# Altium PCB OV2640.PcbDoc
Units mil, origin at the board's own origin, x right, y up, seen from the top; angles counter-clockwise.
Board outline 1130 x 989.35 mil, 2 copper layers (Top Layer, Bottom Layer); 24 components, 26 nets, 116 pads, 39 vias.
Unrouted connection lines stored in the file: 2.
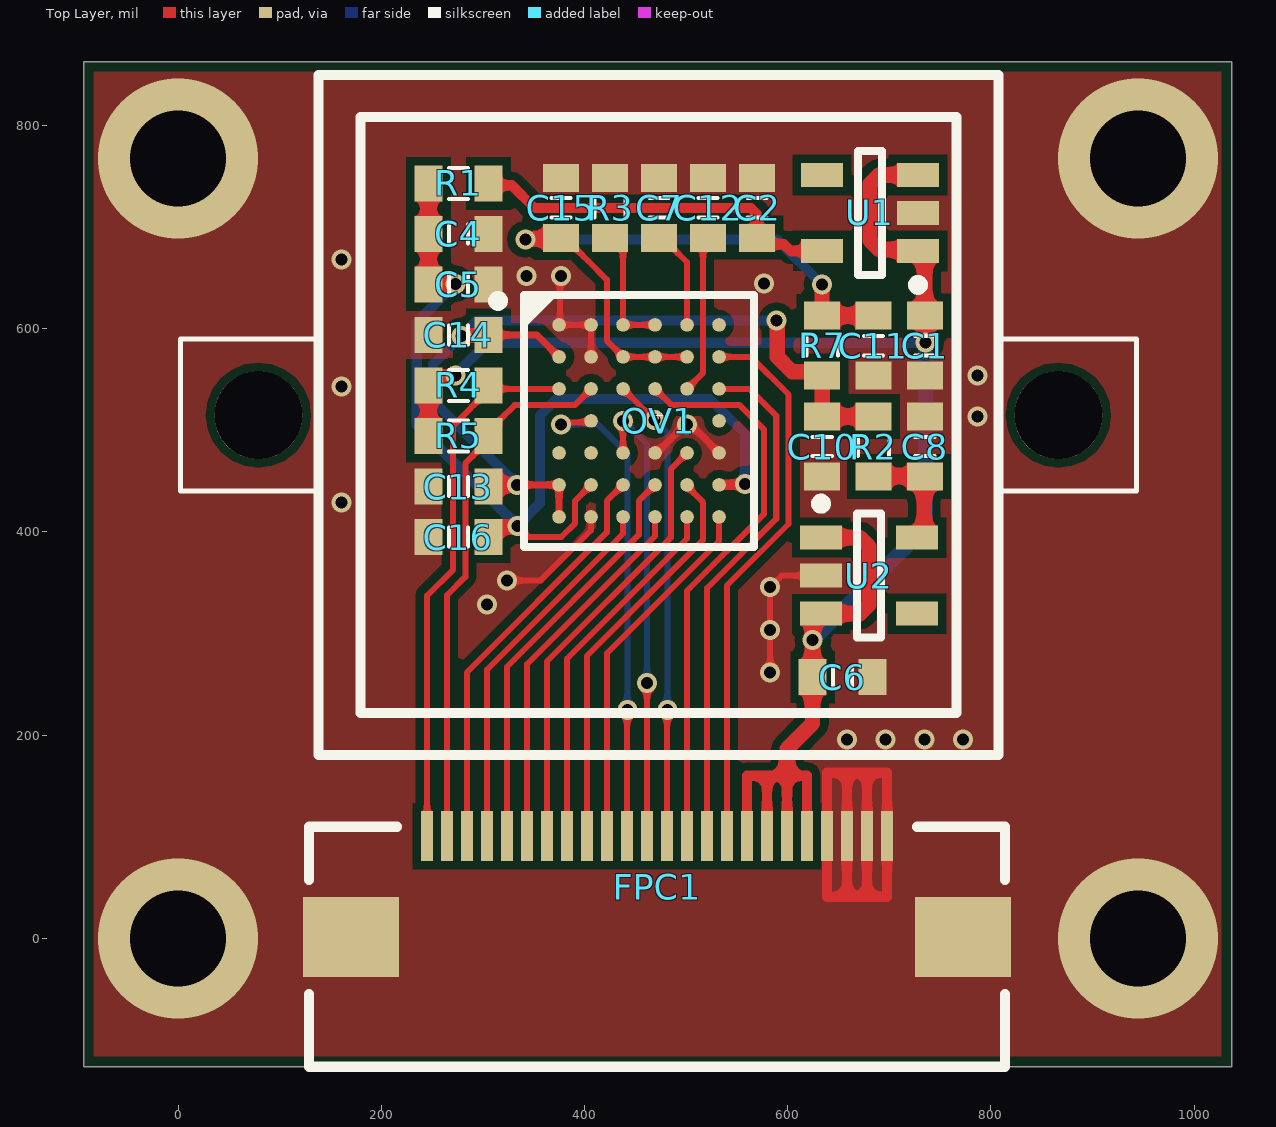
[diagram p0: Top Layer view]
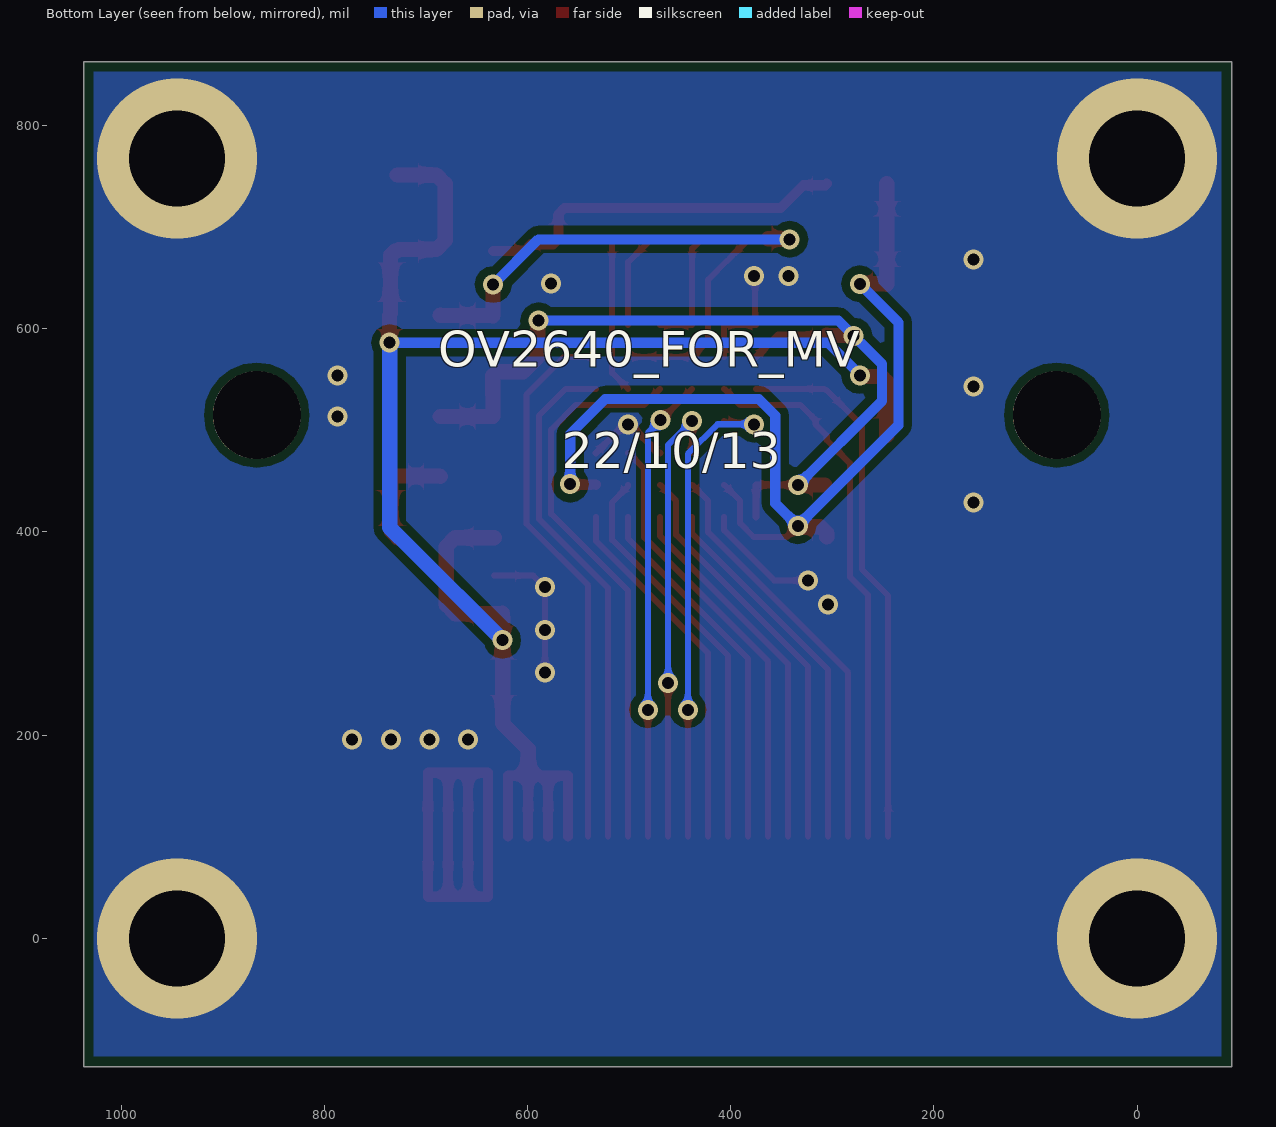
[diagram p1: Bottom Layer view, seen from below]
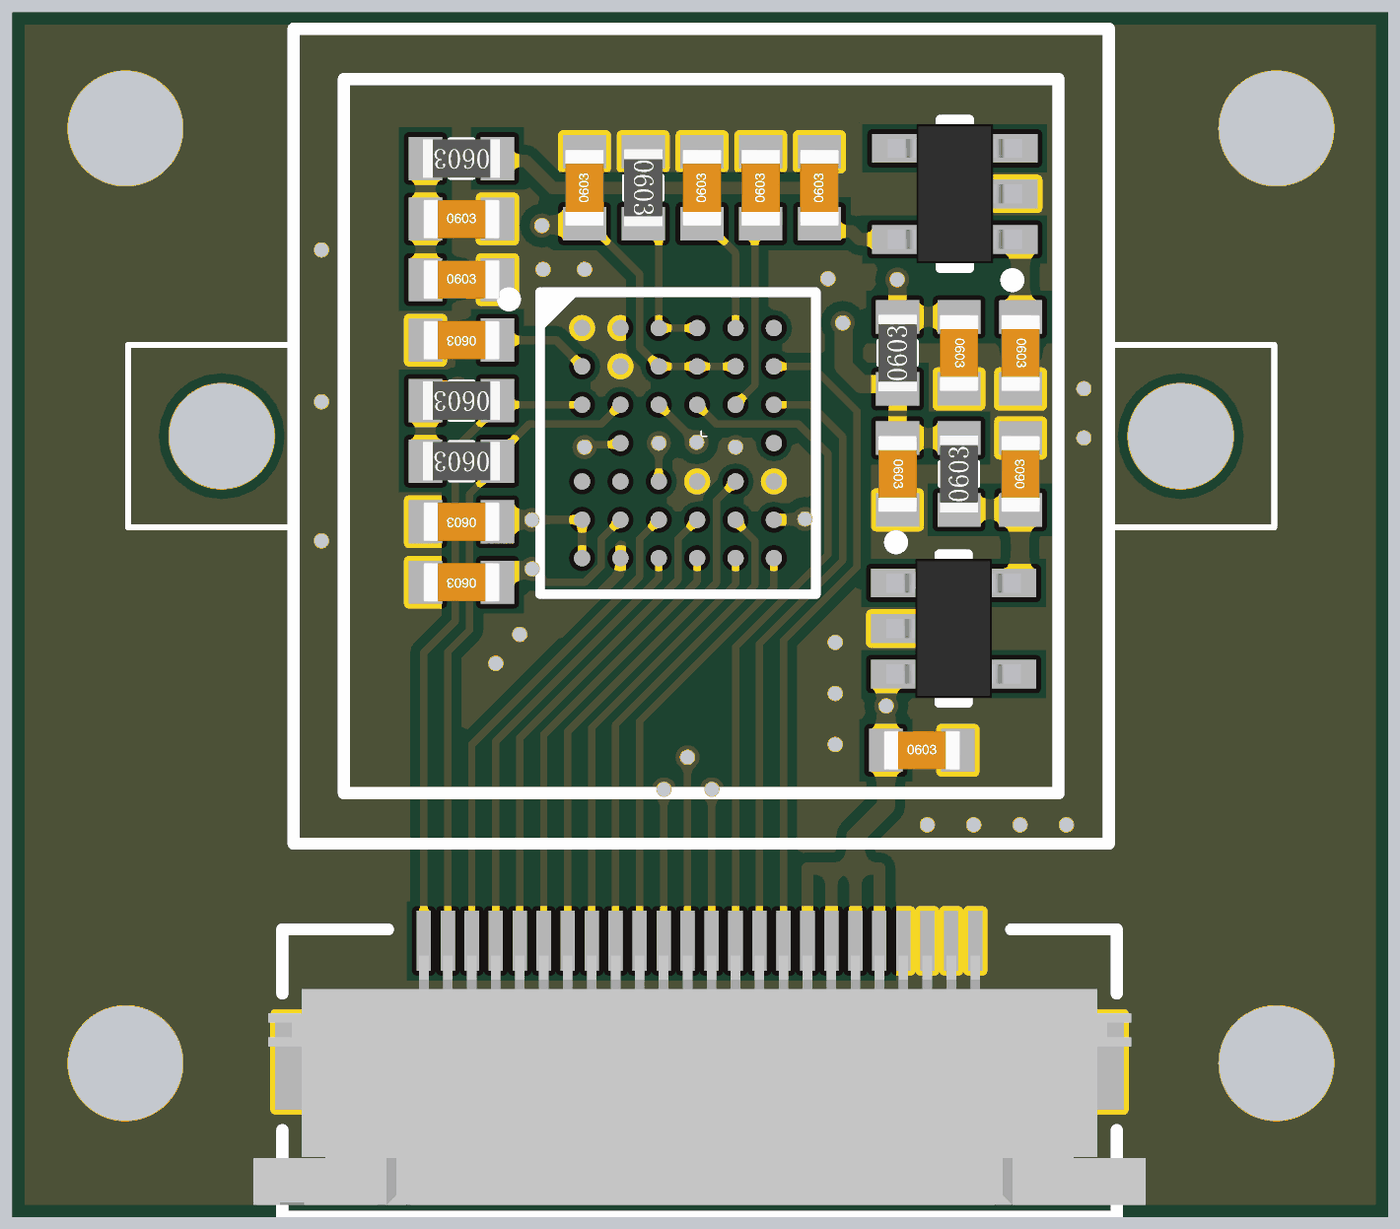
[diagram p2: 3D render of the assembled board from above, using the file's embedded part models]

## Layer stack, top to bottom
Top Solder: solder mask 0.4, Solder Resist, Dk 3.5
Top Layer: signal copper 1.4
Dielectric 1: dielectric 12.6, FR-4, Dk 4.8
Bottom Layer: signal copper 1.4
Bottom Solder: solder mask 0.4, Solder Resist, Dk 3.5

## Board outline
-93.12,-126.35 -93.12,863 1036.88,863 1036.88,-126.35

## Design rules (kind name [scope] priority, off if disabled: settings)
BoardOutlineClearance [All] p1: gap=10 ignorepadtopadclearanceinfootprint=FALSE except(0: Arc-SplitContinuation Track-SplitContinuation SMDPad-SplitContinuation THPad-SplitContinuation Via-SplitContinuation Fill-SplitContinuation Poly-SplitContinuation Region-SplitContinuation Text-SplitContinuation)
Clearance [All] p1: gap=8 ignorepadtopadclearanceinfootprint=TRUE except(0: Arc-Hole Track-Hole SMDPad-Hole THPad-Hole Via-Hole Fill-Hole Poly-Hole Region-Hole Text-Hole; 5: Arc-THPad Track-THPad; 6: Arc-Arc Arc-Track Arc-SMDPad Arc-Via Track-Track Track-SMDPad Track-Via)
PlaneConnect [All] p1: planeconnectstyle=Direct reliefexpansion=20 reliefentries=4 reliefconductorwidth=10 reliefairgap=10
PolygonConnect [All] p1: connectstyle=Direct reliefconductorwidth=10 reliefentries=4 polygonreliefangle="90 Angle" airgapwidth=10
RoutingVias [All] p1: holewidth=11.81 width=19.68 viastyle="Through Hole" minholewidth=11.81 minwidth=19.68 maxholewidth=888 maxwidth=999
SolderMaskExpansion [All] p1: expansion=4 istentingtop=FALSE
Width [All] p1: maxlimit=999 minlimit=6 preferedwidth=6
29 further rules are at their usual default settings.

## Components (designator, comment, footprint, x,y, rotation, side; value= is the part's Value field where it differs from the comment)
C1 "1uF" 0603-C 734.88,583.29 r180 top
C2 "1uF" 0603-C 569.75,719 r0 top
C4 "10uF" 0603-C 275.87,693.29 r270 top
C5 "100nF" 0603-C 275.87,643.58 r270 top
C6 "1uF" 0603-C 653.88,257 r270 top
C7 "100nF" 0603-C 473.32,719 r0 top
C8 "1uF" 0603-C 734.88,484 r0 top
C10 "4.7uF" 0603-C 633.88,484 r180 top
C11 "4.7uF" 0603-C 684.38,583.29 r180 top
C12 "100nF" 0603-C 521.53,719 r0 top
C13 "100nF" 0603-C 275.88,444.73 r90 top
C14 "100nF" 0603-C 275.87,593.87 r90 top
C15 "1uF" 0603-C 376.88,719 r0 top
C16 "4.7uF" 0603-C 275.88,395.02 r90 top
FPC1 "FPC0.5-24P" FPC-SMD_P0.50-24P_XJ-FGS 471.32,50.81 r180 top locked
OV1 "OV2640" 摄像头IC-座子 472.67,515 r0 top locked
R1 "120R@100MHz" 0603-R 275.87,743 r270 top
R2 "120R@100MHz" 0603-R 684.38,484 r180 top
R3 "0R" 0603-R 425.1,719 r0 top
R4 "4.7K" 0603-R 275.87,544.15 r270 top
R5 "4.7K" 0603-R 275.87,494.44 r270 top
R7 "5R" 0603-R 633.88,583.29 r180 top
U1 "XC6228D13MR-G" XC6228D332VR-G 680.88,714 r180 top
U2 "XC6228D282VR-G" XC6228D332VR-G 679.88,357 r0 top

## Footprints (in the part's own frame and the unit in brackets; to place one, negate y for a bottom-side part, rotate by r counter-clockwise, add the part's x,y. Pads: shape width x height; smd on the part's side, far side on the other; paste and mask are expansions set on the pad)
0603-C [mm]
  rect 0.9x0.7 smd: 1(0,0.75) 2(0,-0.75)
  silkscreen extent -0.24,-0.24 0.24,0.24, body extent -0.41,-0.8 0.41,0.8, height 0.84
0603-R [mm]
  rect 0.9x0.7 smd: 1(0,0.75) 2(0,-0.75)
  silkscreen extent -0.39,-0.24 0.39,0.24, body extent -0.4,-0.8 0.4,0.8, height 0.45
FPC-SMD_P0.50-24P_XJ-FGS [mm]
  rect 2.4x2 smd: 0(-7.65,1.262) 0(7.65,1.262)
  rect 0.3x1.25 smd: 1(-5.752,-1.262) 2(-5.25,-1.262) 3(-4.75,-1.262) 4(-4.25,-1.262) 5(-3.75,-1.262) 6(-3.25,-1.262) 7(-2.75,-1.262) 8(-2.25,-1.262) 9(-1.75,-1.262) 10(-1.25,-1.262) 11(-0.75,-1.262) 12(-0.25,-1.262) 13(0.25,-1.262) 14(0.75,-1.262) 15(1.25,-1.262) 16(1.75,-1.262) 17(2.25,-1.262) 18(2.75,-1.262) 19(3.25,-1.262) 20(3.75,-1.262) 21(4.25,-1.262) 22(4.75,-1.262) 23(5.25,-1.262) 24(5.75,-1.262)
  silkscreen extent -8.7,-1.5 8.7,4.5, body extent -9.3,-0.95 9.3,4.25, height 2
XC6228D332VR-G [mm] "SOT23, 5-Leads, Body 2.9x1.6mm, Pitch 0.95mm, IPC Medium Density"
  rect 1.05x0.6 smd: 1(-1.2,0.95) 2(-1.2,0) 3(-1.2,-0.95) 4(1.2,-0.95) 5(1.2,0.95)
  silkscreen extent -1.33,-1.55 0.3,1.92, body extent -1.4,-1.45 1.4,1.45, height 1.2
摄像头IC-座子 [mm]
  round 2.2 hole 2.2 mask+0.102: 1(-10,0) 1(10,0)
  round 0.34 smd: A1(-2.484,2.255) A2(-1.684,2.255) A3(-0.884,2.255) A4(-0.084,2.255) A5(0.716,2.255) A6(1.516,2.255) B1(-2.484,1.455) B2(-1.684,1.455) B3(-0.884,1.455) B4(-0.084,1.455) B5(0.716,1.455) B6(1.516,1.455) C1(-2.484,0.655) C2(-1.684,0.655) C3(-0.884,0.655) C4(-0.084,0.655) C5(0.716,0.655) C6(1.516,0.655) D2(-1.684,-0.145) D6(1.516,-0.145) E1(-2.484,-0.945) E2(-1.684,-0.945) E3(-0.884,-0.945) E4(-0.084,-0.945) E5(0.716,-0.945) E6(1.516,-0.945) F1(-2.484,-1.745) F2(-1.684,-1.745) F3(-0.884,-1.745) F4(-0.084,-1.745) F5(0.716,-1.745) F6(1.516,-1.745) G1(-2.484,-2.545) G2(-1.684,-2.545) G3(-0.884,-2.545) G4(-0.084,-2.545) G5(0.716,-2.545) G6(1.516,-2.545)
  silkscreen extent -8.5,-8.5 8.5,8.5, body extent -3.35,-3.29 2.38,3, height 0.97

## Part data
C1 C2 C4 C5 C6 C7 C8 C10 C11 C12 C13 C14 C15 C16: library part C, "贴片电容", BOM名称=无极性贴片电容, 联系卖家，免费查找封装=唯一出售店铺网址https://shop463601444.taobao.com
FPC1: BOM_JLCPCB Part Class="Extended Part", BOM_Manufacturer="Shenzhen Cankemeng", BOM_Manufacturer Part=-, BOM_Supplier=LCSC, BOM_Supplier Part=C132514, Contributor=LCSC, spicePre=F, spiceSymbolName=FPC0.5-24P
R1 R2 R3 R4 R5 R7: library part R, "贴片电阻", BOM名称=贴片电阻, 联系卖家，免费查找封装=唯一出售店铺网址https://shop463601444.taobao.com
U1: library part XC6228D122VR-G, BOM_JLCPCB Part Class="Extended Part", BOM_Manufacturer=TOREX, BOM_Manufacturer Part=XC6228D332VR-G, BOM_Supplier=LCSC, BOM_Supplier Part=C69841, spicePre=U, spiceSymbolName=XC6228D332VR-G
U2: BOM_JLCPCB Part Class="Extended Part", BOM_Manufacturer=TOREX, BOM_Manufacturer Part=XC6228D332VR-G, BOM_Supplier=LCSC, BOM_Supplier Part=C69841, spicePre=U, spiceSymbolName=XC6228D332VR-G

## Via types
v1: diameter 19.68, hole 11.81, Top Layer to Bottom Layer, tented both sides, 35 vias
v2: diameter 157.48, hole 94.49, Top Layer to Bottom Layer, tented both sides, 4 vias

## Nets (pads, with @x,y where several pads share a name; then routed paths per layer and width w, separated by ;. In a path a pad name is that pad's centre, name@x,y a point inside that pad or via, vN(x,y) a via of type N, cw(c..) or ccw(c..) an arc to the next point about the centre after c; other vN are vias at no path point)
AGND: OV1.A3 OV1.A4 R3.2 | length 123.9
  Top Layer w6: R3.2@424.88,689.47 427.09,689.47 437.87,678.69 OV1.A3 OV1.A4
AVDD: C11.2 C15.2 OV1.B3 OV1.B4 OV1.B5 R7.2 | length 622.2
  Top Layer w6: C15.2 380.82,689.47 391.6,678.69 398.17,672.12 398.17,671.96 403.44,666.69 403.6,666.69 422.06,648.23 422.06,588.09 OV1.B3 OV1.B4 OV1.B5
  Top Layer w15: v1(341.88,688) 342.35,688.47 C15.2@363.05,688.47 ; v1(633.64,643.58) 633.79,643.43 633.79,612.92 R7.2 ; R7.2@634.01,612.82 634.29,613.09 685.53,613.09 C11.2@685.8,613.37
  Bottom Layer w10: v1(341.88,688) 589.21,688 v1(633.64,643.58)
DOVDD: C10.2 C13.2 C14.2 OV1.B1 OV1.F1 OV1.G1 R2.2 R7.1 | length 919.4
  Top Layer w7: C13.2@305.41,444.47 307.25,446.31 OV1.F1 OV1.G1 ; C14.2 353.3,593.87 OV1.B1
  Top Layer w15: v1(278.88,593) 279.31,593.43 304.97,593.43 C14.2 ; C13.2@307.25,446.31 v1@333.63,446.31 ; v1(588.88,608) 589.78,607.1 589.78,572.29 604.44,557.63 630.01,557.63 R7.1 ; C10.2 633.88,535.09 ; 634.01,535.09 R7.1@634.01,553.76 ; C10.2@636.88,513.53 R2.2@685.88,513.53
  Bottom Layer w10: v1(333.7,446.23) 250.88,529.05 250.88,565 293.88,608 447.6,608 v1(588.88,608)
DVDD: C4.2 C5.2 C16.2 OV1.F2 OV1.F6 R1.2 | length 983.2
  Top Layer w6: v1(333.88,406) 344.86,395.02 377.28,395.02 390.68,408.42 390.68,430.61 OV1.F2
  Top Layer w10: OV1.F6 532.7,446.65 557.54,446.65 v1(557.88,447)
  Top Layer w15: C5.2 C4.2 R1.2 ; C5.2@246.42,644.34 v1@272.81,644.34 ; C16.2 305.41,398.83 311.69,405.1 332.99,405.1 v1(333.88,406)
  Bottom Layer w10: v1(272.88,644.27) 234.88,606.27 234.88,505 v1(333.88,406) 356.04,428.16 356.04,514.63 372.25,530.84 523.48,530.84 557.88,496.44 v1(557.88,447)
GND: C1.1 C2.1 C4.1 C5.1 C6.1 C7.1 C8.1 C10.1 C11.1 C12.1 C13.1 C14.1 C15.1 C16.1 FPC1.0 FPC1.1 FPC1.2 FPC1.3 FPC1.4 OV1.A1 OV1.A2 OV1.B2 OV1.E4 OV1.E6 OV1.G2 R3.1 U1.2 U2.2 | length 1060
  Top Layer w6: v1(323.68,352.24) 357.04,352.24 406.37,401.57 OV1.G2 ; v1(376.88,652) 375.88,651 375.88,604.79 OV1.A1 OV1.A2 OV1.B2 ; v1(582.72,261.77) v1(582.72,345.62) 594.09,357 U2.2
  Top Layer w7: OV1.E4 471.02,477.8 499.22,506 504.16,506 519.72,490.44 OV1.E6
  Top Layer w10: 658.33,41 678.01,41 ; 658.33,41 FPC1.3 658.33,163.12 ; 658.33,41 638.64,41 FPC1.4 638.64,163.12 658.33,163.12 ; 658.33,163.12 678.01,163.12 ; 678.01,41 697.78,41 FPC1.1 697.78,163.12 678.01,163.12 ; 678.01,41 FPC1.2 678.01,163.12
  other v1: 658.33,195.81 696.39,195.81 734.45,195.81 772.5,195.81 582.72,303.7 304,328.39 160.88,429.02 500.88,506 786.88,513.53 160.88,543.31 786.88,554 576.72,644.34 342.88,652 160.88,668
  other v2: 0,0 944.88,0 0,767.72 944.88,767.72
NetC7_2: C7.2 OV1.A5 | length 99.6
  Top Layer w6: C7.2@472.88,689.47 476.82,689.47 500.86,665.43 OV1.A5
NetC12_2: C12.2 OV1.C5 | length 156.9
  Top Layer w6: OV1.C5 516.66,556.6 516.66,683.78 C12.2@521.88,689
OV_D0: FPC1.22 OV1.F3 | length 409.4
  Top Layer w6: FPC1.22 284.31,261.77 422.06,399.52 422.06,430.5 OV1.F3
OV_D1: FPC1.21 OV1.G3 | length 369.8
  Top Layer w6: FPC1.21 304,264.49 437.87,398.35 OV1.G3
OV_D2: FPC1.20 OV1.F4 | length 406.2
  Top Layer w6: FPC1.20 323.68,267.2 453.56,397.07 453.56,430.5 OV1.F4
OV_D3: FPC1.19 OV1.G4 | length 366.5
  Top Layer w6: FPC1.19 343.37,269.92 469.36,395.91 OV1.G4
OV_D4: FPC1.18 OV1.E5 | length 434.4
  Top Layer w6: FPC1.18 363.05,272.63 485.17,394.74 485.17,462.11 OV1.E5
OV_D5: FPC1.17 OV1.G5 | length 363.2
  Top Layer w6: FPC1.17 382.74,275.35 500.86,393.46 OV1.G5
OV_D6: FPC1.16 OV1.F5 | length 399.7
  Top Layer w6: FPC1.16 402.42,278.06 516.66,392.29 516.66,429.02 500.86,444.83 OV1.F5
OV_D7: FPC1.15 OV1.G6 | length 360
  Top Layer w6: FPC1.15 422.11,280.78 532.35,391.02 OV1.G6
OV_HREF: FPC1.12 OV1.C3 | length 458.6
  Top Layer w6: OV1.C3 468.66,510 v1(468.88,510) ; FPC1.12 481.31,100.63 481.31,224.78 v1(481.45,224.92)
  Bottom Layer w6: v1(468.88,510) 481.45,497.44 v1(481.45,224.92)
OV_PCLK: FPC1.13 OV1.E3 | length 450.1
  Top Layer w6: OV1.E3 v1(437.87,509.3) ; FPC1.13 v1(461.48,251.23)
  Bottom Layer w6: v1(437.87,509.3) 461.48,485.68 v1(461.48,251.23)
OV_PWDN: FPC1.9 OV1.B6 | length 543.6
  Top Layer w6: OV1.B6 563.79,572.29 600.72,535.36 600.72,407.84 540.22,347.34 FPC1.9
OV_RESET: FPC1.10 OV1.C6 | length 509.4
  Top Layer w6: FPC1.10 520.53,344.65 588.72,412.84 588.72,514.38 562.31,540.8 OV1.C6
OV_SCL: FPC1.23 OV1.C2 R5.1 | length 533.7
  Top Layer w6: FPC1.23 264.63,337.91 282.63,355.91 282.63,467.73 305.4,490.51 305.4,494.81 316.18,505.59 316.18,509.87 331.16,524.84 390.42,524.84 OV1.C2
OV_SDA: FPC1.24 OV1.C1 R4.1 | length 531.2
  Top Layer w6: FPC1.24 244.94,195.81 244.94,337.31 270.63,363 270.63,504.6 R4.1@305.4,539.37 ; R4.1@307.64,540.8 OV1.C1
OV_VSYNC: FPC1.14 OV1.D2 | length 484.6
  Top Layer w6: v1(376.88,506) 378.77,507.89 404.96,507.89 OV1.D2 ; FPC1.14 441.94,100.63 441.94,224.78 v1(442.08,224.92)
  Bottom Layer w6: v1(376.88,506) 412.88,506 442.08,476.81 v1(442.08,224.92)
OV_XVCLK: FPC1.11 OV1.C4 | length 555.5
  Top Layer w6: OV1.C4 485.17,524.99 552.32,524.99 576.72,500.59 576.72,417.84 500.86,341.98 FPC1.11
VCC-1.3V: C2.2 R1.1 U1.5 | length 369.6
  Top Layer w10: R1.1@305.4,742.64 306.84,741.2 328.32,741.2 350.72,718.81 563.6,718.81 569.46,712.95 C2.2@569.46,688.47 ; C2.2@569.75,688.47 575.01,683.22 596.2,683.22 602.82,676.6 U1.5
VCC-2.8V: C8.2 R2.1 U2.5 | length 112.5
  Top Layer w15: R2.1@685.88,454.47 686.38,454.97 734.38,454.97 734.38,401.21 727.57,394.4 U2.5
VCC-3.3V: C1.2 C6.2 FPC1.5 FPC1.6 FPC1.7 FPC1.8 R4.2 R5.2 U1.1 U1.3 U2.1 U2.3 | length 1807.3
  Top Layer w10: FPC1.8 559.9,159.98 579.59,159.98 ; FPC1.7 579.59,159.98 ; FPC1.6 599.27,159.98 ; FPC1.5 618.96,159.98 599.27,159.98 ; 579.59,159.98 599.27,159.98
  Top Layer w15: R5.2@246.35,494.81 R4.2@246.35,543.31 ; R4.2 246.35,547.82 251.63,553.1 271.99,553.1 v1(272.88,554) ; 599.27,159.98 599.27,186.35 624.35,211.43 C6.2 624.35,315.29 U2.3@624.65,315.58 ; v1@624.65,293.54 U2.3@624.65,315.58 ; U2.3@624.65,319.92 U2.3@624.65,315.58 ; U2.3@630.81,317.77 U2.3 ; U2.1 671.1,394.4 679.88,385.61 679.88,328.39 671.1,319.6 U2.3 ; U1.3 689.67,751.4 680.88,742.61 680.88,686.76 689.67,677.97 726.75,677.97 U1.1 730.57,676.6 734.88,672.29 C1.2@734.88,615.53 ; v1@735.65,586.36 C1.2@735.65,612.74 ; U2.3@624.65,315.58 628.66,319.6 U2.3
  Bottom Layer w10: v1(272.88,554) 272.88,555 304.17,586.28 v1(735.57,586.28)
  Bottom Layer w15: v1(624.57,293.46) 714.11,383 735.57,404.46 v1(735.57,586.28)
pads on no net: OV1.1 OV1.A6 OV1.D6 OV1.E1 OV1.E2 U1.4 U2.4

## Polygon pours and split planes (outlines as drawn)
GND on Bottom Layer "GND_L02_P000" (solid, remove dead copper, pour order 0): -93.12,-126.35 -93.12,863 1036.88,863 1036.88,-126.35
GND on Top Layer "GND_L01_P002" (solid, remove dead copper, pour order 2): -93.12,-126.35 -93.12,863 1036.88,863 1036.88,-126.35

## Silkscreen, mask and mechanical layers (free items; w line width, h text height)
Top Overlay:
  lines w5: 138.02,440.2 78.96,440.2 2.19,440.2 2.19,589.81 78.96,589.81 138.02,589.81 ; 807.31,440.2 866.37,440.2 943.14,440.2 943.14,589.81 866.37,589.81 807.31,589.81
Bottom Overlay:
  text "OV2640_FOR_MV" at 687.6,550.66 h60
  text "22/10/13" at 566.45,450.67 h60
Mechanical 1:
  the board outline again, w10